# Altium PCB PCB1.PcbDoc
Units mm, origin at the board's own origin, x right, y up, seen from the top; angles counter-clockwise.
Board outline 58.25 x 58.25 mm, 2 copper layers (Top Layer, Bottom Layer); 40 components, 36 nets, 187 pads, 36 vias.
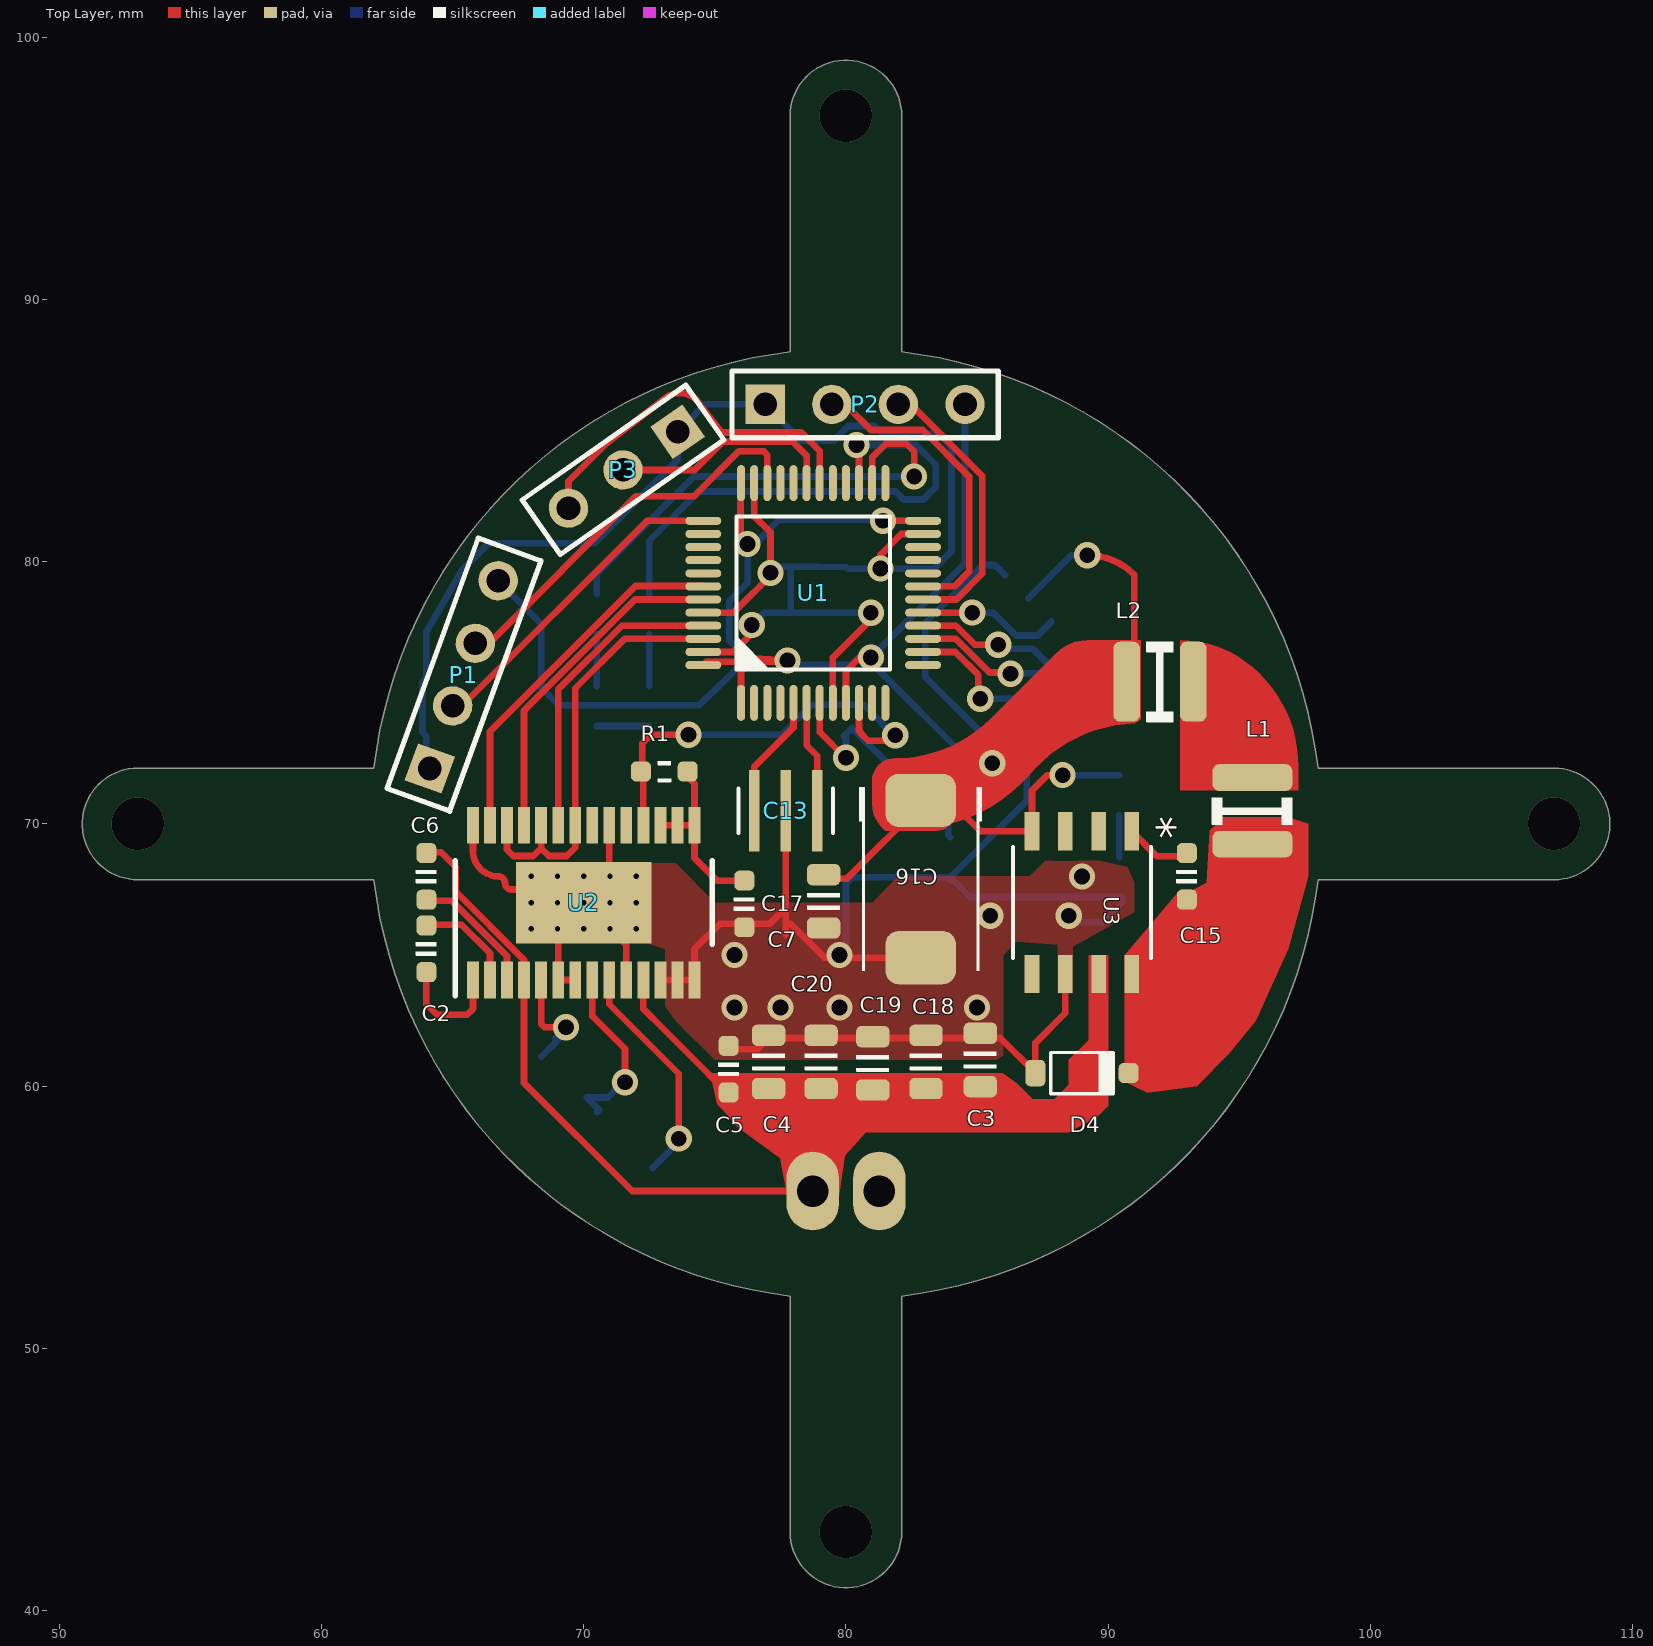
[diagram p0: Top Layer view]
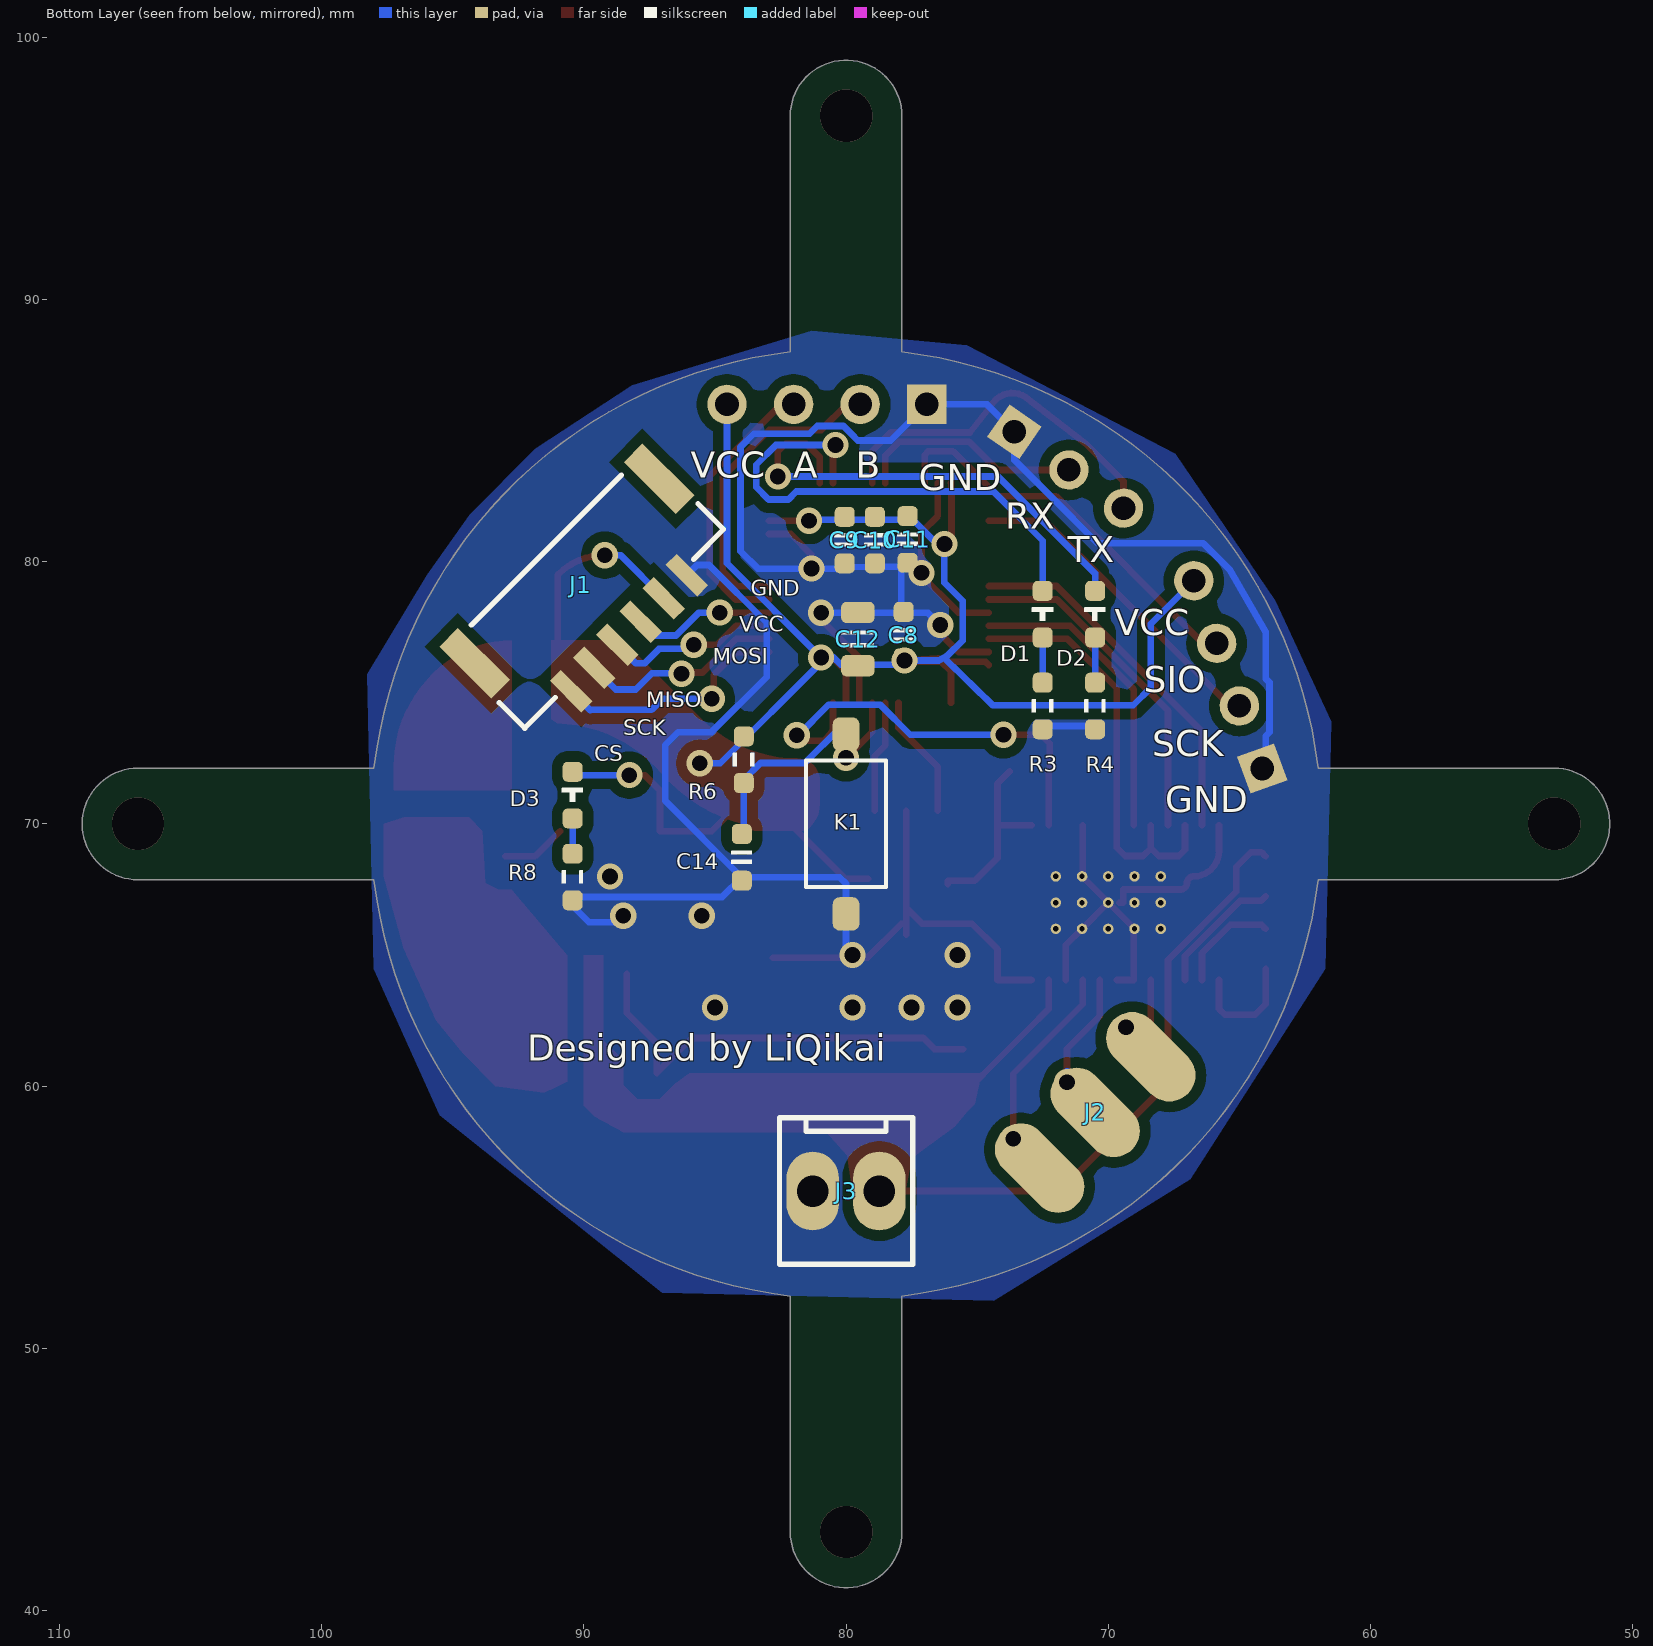
[diagram p1: Bottom Layer view, seen from below]
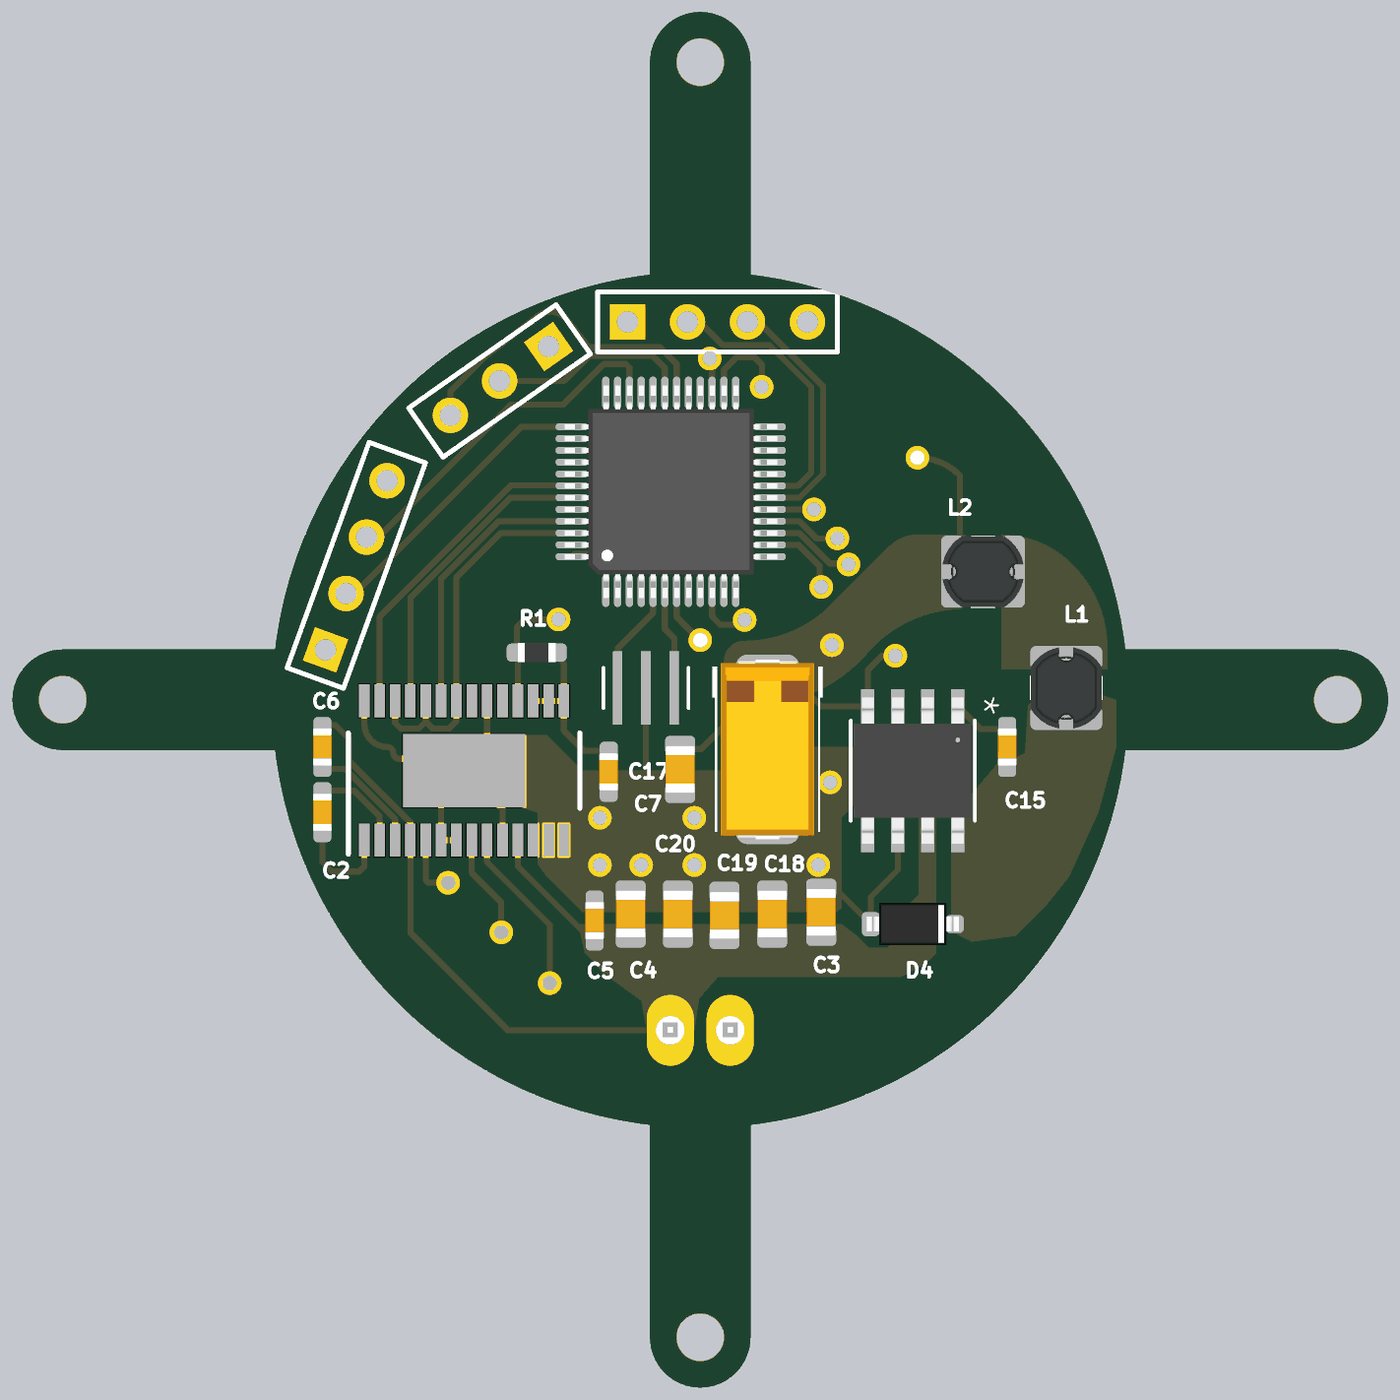
[diagram p2: 3D render of the assembled board from above, using the file's embedded part models]
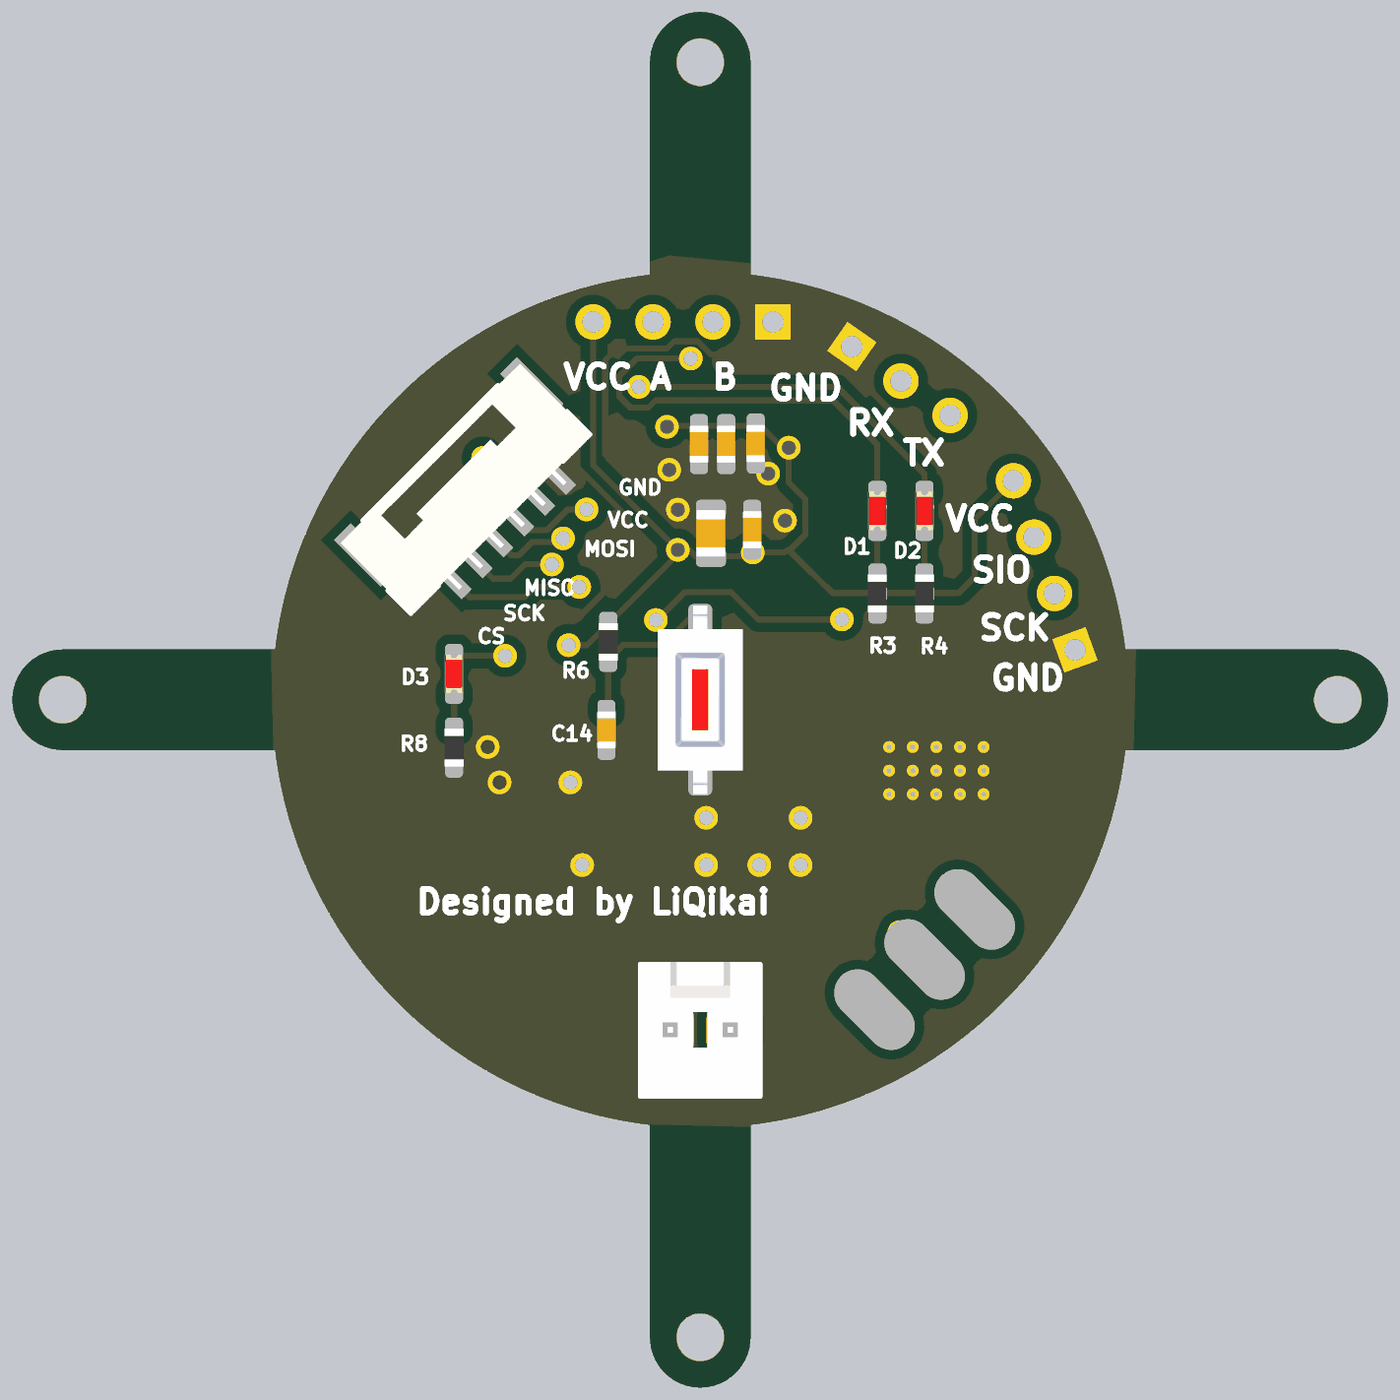
[diagram p3: 3D render of the assembled board from below, using the file's embedded part models]

## Layer stack, top to bottom
Top Solder: solder mask 0.0102, Solder Resist, Dk 3.5
Top Layer: signal copper 0.0356
Dielectric 1: dielectric 0.32, FR-4, Dk 4.8
Bottom Layer: signal copper 0.0356
Bottom Solder: solder mask 0.0102, Solder Resist, Dk 3.5

## Board outline
53,67.873 61.998,67.873 ccw(c80,70) 77.873,51.998 77.873,43 ccw(c80,43) 82.127,43 82.127,51.998 ccw(c80,70) 98.002,67.873 107,67.873 ccw(c107,70) 109.127,70 ccw(c107,70) 107,72.127 98.002,72.127 ccw(c80,70) 82.127,88.002 82.127,97 ccw(c80,97) 77.873,97 77.873,88.002 ccw(c80,70) 61.998,72.127 53,72.127 ccw(c53,70)

## Design rules (kind name [scope] priority, off if disabled: settings)
Clearance Clearance_1 [(InPoly)] p1: gap=0.4 ignorepadtopadclearanceinfootprint=TRUE
Clearance [All] p2: gap=0.1 ignorepadtopadclearanceinfootprint=TRUE
ComponentClearance [InComponent('U1') vs OnLayer('Mechanical 13')] p1: gap=0.15 collisioncheckmode=3 verticalgap=0.15 showdistances=FALSE
MinimumSolderMaskSliver [All] p1: minsoldermaskwidth=0
PlaneConnect [All] p1: planeconnectstyle=Direct reliefexpansion=0.508 reliefentries=4 reliefconductorwidth=0.254 reliefairgap=0.254
PolygonConnect [All] p1: connectstyle=Direct reliefconductorwidth=0.254 reliefentries=4 polygonreliefangle="90 Angle" airgapwidth=0.254
RoutingVias RoutingVias_1 [All] p1: holewidth=0.711 width=1.27 viastyle="Through Hole" minholewidth=0.711 minwidth=1.27 maxholewidth=0.711 maxwidth=1.27 useviatemplates=TRUE viatemplateguid#1={CD471C17-E340-4C54-9564-A7C13DCCF5B5} viatemplatename#1=v100h60
SolderMaskExpansion [All] p1: expansion=0
Width [All] p1: maxlimit=0.254 minlimit=0.254 preferedwidth=0.254
27 further rules are at their usual default settings.

## Components (designator, comment, footprint, x,y, rotation, side; value= is the part's Value field where it differs from the comment)
C2 "C0603" CAP_0603 64,65.238 r90 top value=0.01uF
C3 "C0805" CAP_0805 85.125,61 r270 top value=10uF
C4 "C0805" CAP_0805 77.053,60.925 r270 top value=10uF
C5 "C0603" CAP_0603 75.525,60.65 r270 top value=0.1uF
C6 "C0603" CAP_0603 64,68 r90 top value=0.1uF
C7 "C0603" CAP_0603 76.125,66.95 r90 top value=0.47uF
C8 "C0603" CAP_0603 77.8,77.2 r270 bottom value=0.1uF
C9 "C0603" CAP_0603 80.05,80.825 r90 bottom value=0.1uF
C10 "C0603" CAP_0603 78.9,80.825 r90 bottom value=0.1uF
C11 "C0603" CAP_0603 77.65,80.85 r90 bottom value=0.1uF
C12 "C0805" CAP_0805 79.55,77.05 r270 bottom value=4.7uF
C13 "CSTCE8M00G52-R0" CSTCE_MUR 77.7,70.5 r0 top
C14 "C0603" CAP_0603 83.975,68.725 r90 bottom value=4.7uF
C15 "C0603" CAP_0603 93,68 r270 top value=?F
C16 "C2917" CAP_TAN_D2917 82.85,67.9 r270 top value=100uF
C17 "C0805" CAP_0805 79.15,67.05 r90 top value=10uF
C18 "C0805" CAP_0805 83.053,60.925 r270 top value=10uF
C19 "C0805" CAP_0805 81.025,60.871 r270 top value=10uF
C20 "C0805" CAP_0805 79.053,60.925 r270 top value=10uF
D1 "D0603" LED_0603_RED 72.5,78 r270 bottom value=Red
D2 "D0603" LED_0603_RED 70.5,78 r270 bottom value=Orange
D3 "D0603" LED_0603_RED 90.425,71.1 r270 bottom value=Green
D4 "NAME" SOD-123 89,60.5 r0 top
J1 "MAG" "JST BM06B-GHS-TBT" 90,79 r135 bottom
J2 "Header" Motor_WIRE_3 70.5,59 r135 bottom
J3 "2 Pin" "MOLEX KK 0022272021" 80,56 r0 bottom
K1 "TACT" ButtonTACT_3x6x2.5_180 80,70 r90 bottom value=3x6mm
L1 "CD32" IND_CD32 95.5,70.5 r90 top value=22uH
L2 "CD32" IND_CD32 91.975,75.425 r180 top value=22uH
P1 "SWD" HDR1X4 64.131,72.113 r70 top
P2 "ENCODER" HDR1X4 76.92,86 r0 top
P3 "Header 3" HDR1X3 73.581,84.957 r215 top
R1 "R0603" RES_0603 73.075,72 r0 top value=10K
R3 "R0603" RES_0603 72.5,74.5 r90 bottom value=1K
R4 "R0603" RES_0603 70.5,74.5 r90 bottom value=1K
R6 "R0603" RES_0603 83.9,72.45 r90 bottom value=10K
R8 "R0603" RES_0603 90.425,67.975 r90 bottom value=1K
U1 "STM32F103C" LQFP_P0.5_48 78.75,78.809 r90 top
U2 "DRV8313PWPR" PWP0028F_N 70,67 r90 top value=Value
U3 "LM2674M-3.3" M08A_TEX 89,67 r270 top

## Footprints (in the part's own frame and the unit in brackets; to place one, negate y for a bottom-side part, rotate by r counter-clockwise, add the part's x,y. Pads: shape width x height; smd on the part's side, far side on the other; paste and mask are expansions set on the pad)
ButtonTACT_3x6x2.5_180 [mil]
  rrect50% 50x40 smd: 1(-135,0) 2(135,0)
  silkscreen extent -95,-60 95,60, body extent -157,-71 157,71, height 94
CAP_0603 [mil]
  rrect50% 30x30 smd: 1(-35,0) 2(35,0)
  silkscreen extent -10,-15 10,15, body extent -31,-16 31,16, height 31
CAP_0805 [mil]
  rrect50% 32x50 smd: 1(-40,0) 2(40,0)
  silkscreen extent -12,-24 12,24, body extent -39,-25 39,25, height 39
CAP_TAN_D2917 [mil]
  rrect50% 80x106 smd: 1(-118,0) 2(118,0)
  silkscreen extent -138,-92 138,92, body extent -150,-78 150,78, height 122
CSTCE_MUR [mil]
  rect 16x122.36 smd paste+0 mask+0: 1(-47.24,0) 2(0,0) 3(47.24,0)
  silkscreen extent -71,-34 71,34, body extent 0,0 10,10, height 10
HDR1X3 [mm] "Connector; Header; 3 Position"
  rect 1.5x1.5 hole 0.9: 1(0,0)
  round 1.5 hole 0.9: 2(2.54,0) 3(5.08,0)
  silkscreen extent -1.27,-1.27 6.35,1.27
HDR1X4 [mm] "Connector; Header; 4 Position"
  rect 1.5x1.5 hole 0.9: 1(0,0)
  round 1.5 hole 0.9: 2(2.54,0) 3(5.08,0) 4(7.62,0)
  silkscreen extent -1.27,-1.27 8.89,1.27
IND_CD32 [mil]
  rrect50% 40x120 smd: 1(-50,0) 2(50,0)
  silkscreen extent -20,-60 20,60, body extent -68,-59 68,59, height 83
"JST BM06B-GHS-TBT" [mm] "JST GH Series 1.25mm pitch, top entry connector"
  rect 0.6x1.7 smd: 1(-3.125,-2.437) 2(-1.875,-2.437) 3(-0.625,-2.437) 4(0.625,-2.437) 5(1.875,-2.437) 6(3.125,-2.437)
  rect 1x2.8 smd: M(-4.975,0.913) M(4.975,0.913)
  silkscreen extent -5.38,-2.19 5.35,2.03, body extent -5.38,-2.92 5.37,2.03, height 4.18
LED_0603_RED [mil]
  rrect50% 30x30 smd: 1(-35,0) 2(35,0)
  silkscreen extent -10,-16 10,16, body extent -32,-16 32,16, height 24
LQFP_P0.5_48 [mil]
  oval 54x12 smd: 1(-165,108.27) 2(-165,88.58) 3(-165,68.9) 4(-165,49.21) 5(-165,29.53) 6(-165,9.84) 7(-165,-9.84) 8(-165,-29.53) 9(-165,-49.21) 10(-165,-68.9) 11(-165,-88.58) 12(-165,-108.27) 25(165,-108.27) 26(165,-88.58) 27(165,-68.9) 28(165,-49.21) 29(165,-29.53) 30(165,-9.84) 31(165,9.84) 32(165,29.53) 33(165,49.21) 34(165,68.9) 35(165,88.58) 36(165,108.27)
  oval 12x54 smd: 13(-108.27,-165) 14(-88.58,-165) 15(-68.9,-165) 16(-49.21,-165) 17(-29.53,-165) 18(-9.84,-165) 19(9.84,-165) 20(29.53,-165) 21(49.21,-165) 22(68.9,-165) 23(88.58,-165) 24(108.27,-165) 37(108.27,165) 38(88.58,165) 39(68.9,165) 40(49.21,165) 41(29.53,165) 42(9.84,165) 43(-9.84,165) 44(-29.53,165) 45(-49.21,165) 46(-68.9,165) 47(-88.58,165) 48(-108.27,165)
  silkscreen extent -115,-115 115,115, body extent -177,-178 177,177, height 61
M08A_TEX [mil]
  rect 57.5x22 smd paste+0 mask+0: 1(-107.25,75) 2(-107.25,25) 3(-107.25,-25) 4(-107.25,-75) 5(107.25,-75) 6(107.25,-25) 7(107.25,25) 8(107.25,75)
  silkscreen extent -84,-104 84,104, body extent -122,-99 122,99, height 69
"MOLEX KK 0022272021" [mm]
  oval 2x3 hole 1.2: 1(-1.27,0) 2(1.27,0)
  silkscreen extent -2.54,-2.79 2.54,2.79, body extent -2.54,-2.9 2.54,2.9, height 11.7
Motor_WIRE_3 [mm]
  oval 2x4 smd: 1(-3,0) 2(0,0) 3(3,0)
PWP0028F_N [mm]
  rect 1.4x0.45 smd paste+0 mask+0.051: 1(-2.95,4.225) 2(-2.95,3.575) 3(-2.95,2.925) 4(-2.95,2.275) 5(-2.95,1.625) 6(-2.95,0.975) 7(-2.95,0.325) 8(-2.95,-0.325) 9(-2.95,-0.975) 10(-2.95,-1.625) 11(-2.95,-2.275) 12(-2.95,-2.925) 13(-2.95,-3.575) 14(-2.95,-4.225) 15(2.95,-4.225) 16(2.95,-3.575) 17(2.95,-2.925) 18(2.95,-2.275) 19(2.95,-1.625) 20(2.95,-0.975) 21(2.95,-0.325) 22(2.95,0.325) 23(2.95,0.975) 24(2.95,1.625) 25(2.95,2.275) 26(2.95,2.925) 27(2.95,3.575) 28(2.95,4.225)
  round 0.4 hole 0.203 mask+0.051: 20(-1,2) 20(-1,-1) 20(-1,0) 20(-1,1) 20(-1,-2) 20(0,2) 20(0,1) 20(0,0) 20(0,-1) 20(0,-2) 20(1,2) 20(1,-1) 20(1,0) 20(1,1) 20(1,-2)
  rect 3.1x5.18 smd paste+0 mask+0.051: 29(0,0)
  silkscreen extent -3.55,-4.9 1.6,4.9, body extent 0,0 0.25,0.25, height 0.25
RES_0603 [mil]
  rrect50% 30x30 smd: 1(-35,0) 2(35,0)
  silkscreen extent -10,-16 10,16, body extent -31,-16 31,16, height 18
SOD-123 [mil]
  rrect50% 30x40 smd: 1(-70,0)
  rrect50% 30x30 smd: 2(70,0)
  silkscreen extent -47,-31 47,31, body extent -77,-35 77,35, height 46

## Part data
C2 C5 C6 C7 C8 C9 C10 C11 C14 C15: library part Cap_0603, "Capacitor", Note=±10%, Specification="X7R, ±10%, 16V", Type=0603
C3 C4 C12 C17 C18 C19 C20: library part Cap_0805, "Capacitor", Note=±10%, Specification="X7R, ±10%, 16V", Type=0805
C13 U3: "No Description Available", Built_By=EMA_UL_Team, Copyright="Copyright (C) 2018 Accelerated Designs. All rights reserved", RefDes=RefDes, Type=DEV
  C13: Manufacturer_Part_Number=CSTCE8M00G52-R0, SourceLibrary=Murata_2017-04-18, Vendor=Murata
  U3: Manufacturer_Part_Number=LM2674M-3.3, SourceLibrary=National_2011-09-26, Vendor="Texas Instruments"
C16: library part Cap_Tan_2917, "Capacitor Tantalum", Note=±10%, Specification="X7R, ±10%, 16V", Type=2917
D1 D2 D3: library part LED_0603, "LED", Type=0603
D4: library part Diode_SOD123, "Diode", Type=SOD123
J1: library part "6 Pin"
J2: library part "3 Pin"
K1: library part ButtonTACT_180_3x6x2.5, "Button", Type="TACT 2P"
L1 L2: library part Ind_CD32, "Power Inductor", Note=±5%, Specification="High frequency chip inductor ±5%", Type=CD32
P1 P2: library part "Header 4", "Header, 4-Pin", LatestRevisionDate=17-Jul-2002, LatestRevisionNote="Re-released for DXP Platform.", Publisher="Altium Limited"
P3: "Header, 3-Pin", LatestRevisionDate=17-Jul-2002, LatestRevisionNote="Re-released for DXP Platform.", Publisher="Altium Limited"
R1 R3 R4 R6 R8: library part Res_0603, "Resistor", Note=±1%, Specification=±1%, Type=0603
U1: "MCU ST", Manufacturer=STMicroelectronics, Note=CortexM3, Type="LQFP48 P0.5"
U2: "No Description Available", Manufacturer="Texas Instruments", Copyright="Copyright (C) 2018 Accelerated Designs. All rights reserved", PartNumber=DRV8313PWPR, RefDes=RefDes, Type=DEV

## Via types
v1: diameter 1/1 (per signal layer), hole 0.6, Top Layer to Bottom Layer, 32 vias
v2: diameter 2, hole 2, Top Layer to Bottom Layer, 4 vias

## Nets (pads, with @x,y where several pads share a name; then routed paths per layer and width w, separated by ;. In a path a pad name is that pad's centre, name@x,y a point inside that pad or via, vN(x,y) a via of type N, cw(c..) or ccw(c..) an arc to the next point about the centre after c; other vN are vias at no path point)
A: P2.3 U1.18 | length 10.7
  Top Layer w0.254: P2.3 82.475,86 85.2,83.275 85.2,79.55 84.209,78.559 U1.18
B: P2.2 U1.19 | length 12
  Top Layer w0.254: P2.2 79.975,86 80.952,85.023 82.927,85.023 84.696,83.254 84.696,79.621 84.134,79.059 U1.19
CON: C7.2 R1.2 U2.15 U2.16 U2.17 | length 7.2
  Top Layer w0.254: U2.17 U2.16 U2.15 ; R1.2@73.762,72 74.225,71.537 U2.15 ; C7.2@76.125,67.712 C7.2 75.086,67.839 74.225,68.7 U2.15
EN: U1.46 U2.22 U2.24 U2.26 | length 16.6
  Top Layer w0.254: U2.26 67.075,69.014 67.314,68.775 67.316,68.777 68.077,68.777 68.375,69.075 ; U2.24 68.375,69.075 ; U1.46 71.559,77.059 69.675,75.175 69.675,69.1 69.352,68.777 68.673,68.777 68.375,69.075
ERROR: R1.1 U1.10 U2.18 | length 17.2
  Top Layer w0.254: R1.1@72.238,72 R1.1@72.238,72.19 ; U2.18 72.275,71.963 72.276,71.964 72.281,71.971 72.274,72.007 72.272,72.017 72.269,72.031 R1.1@72.238,72.19 ; v1(74,73.4) 72.561,73.4 72.238,73.077 R1.1@72.238,72.19 ; U1.10 80.5,73.553 80.552,73.501 80.552,73.473 80.85,73.175 82.083,73.175 v1(81.879,73.379)
  Bottom Layer w0.254: v1(74,73.4) 77.55,73.4 78.7,74.55 80.657,74.55 81.829,73.379 v1(81.879,73.379)
GND: C3.1 C4.1 C5.1 C7.1 C8.1 C9.1 C10.1 C11.1 C12.1 C13.2 C14.1 C16.2 C17.1 C18.1 C19.1 C20.1 D4.1 J1.6 J3.2 K1.1 P1.1 P2.1 P3.1 R3.1 R4.1 R8.1 U1.8 U1.23 U1.35 U1.44 U1.47 U2.6 U2.7 U2.10 U2.12 U2.13 U2.14 U2.20 U2.28 U2.29 U3.6 | length 152.4
  Top Layer w0.254: U2.28 65.775,68.975 ccw(c66.75,68.975) 66.75,68 cw(c66.75,67.75) 67,67.75 ccw(c67.25,67.75) 67.25,67.5 69.427,67.5 69.427,67 U2.29@69.573,67 ; U2.7 U2.6 69.025,66.025 U2.29 ; U2.20@70.975,69.95 70.975,67.975 U2.29 ; U2.10 71.625,65.375 71,66 U2.29 ; U2.12 U2.13 U2.14 74.225,65.225 75.188,66.188 77.087,66.188 77.599,66.7 ; U1.47 75.706,76.559 76.733,77.586 v1(76.411,77.586) ; U1.44 75.709,78.059 v1@77.225,79.575 ; C5.1@75.525,61.412 76.625,61.412 77.053,61.839 C3.1@85.05,61.839 ; U1.35 76.5,81.75 77.125,81.125 v1(77.125,79.575) v1@77.225,79.575 ; v1@77.325,79.675 v1@77.225,79.575 ; 77.7,65.775 77.7,66.188 ; C13.2 77.7,66.188 ; U1.8 79.5,76.35 80.95,77.8 v1(80.95,78.05) ; v1(81.313,79.738) 81.313,80.263 82.109,81.059 U1.23 ; C16.2@82.8,64.903 79.183,64.903 77.898,66.188 77.7,66.188 ; C3.1@85.125,61.914 C3.1@85.05,61.839 ; U3.6 88.365,62.79 87.222,61.647 D4.1 85.883,61.839 C3.1@85.05,61.839
  Bottom Layer w0.254: P1.1 64,72.244 64,73.346 63.85,73.496 63.85,75.399 64,75.549 64,77.329 65.383,79.708 66.375,80.7 70.4,80.7 72.223,82.523 ; R4.1@70.5,73.738 R3.1@72.5,73.738 ; 72.223,82.523 73.581,83.881 P3.1 74.624,86 P2.1 78.295,84.625 79.549,84.625 79.673,84.749 79.673,84.751 80.099,85.177 81.098,85.177 81.396,84.879 83.521,84.879 84.025,84.375 84.025,80.4 83.363,79.738 v1(81.313,79.738) 80.05,79.738 80,79.788 78.925,79.813 77.438,79.813 77.2,79.575 v1(77.125,79.575) ; v1(76.411,77.586) 76.875,78.05 v1(80.95,78.05) ; C11.1@77.875,79.763 77.9,79.738 C8.1@77.9,78.089 ; v1@80,64.75 K1.1 80,67.725 80.238,67.963 C14.1@83.975,67.963 ; C14.1 C14.1@83.975,67.963 ; J1.6 85.679,79.875 85.225,79.875 83.025,77.675 83.025,75.6 85.125,73.5 86.4,73.5 86.9,73 86.9,70.888 C14.1@83.975,67.963 ; v1@88.25,66.25 89.8,66.25 90.525,66.975 90.525,67.213 84.725,67.213 C14.1@83.975,67.963
  other v1: 75.75,63 77.5,63 79.75,63 85,63 75.75,65 79.75,65 85.5,66.5 88.5,66.5 89,68
LED1: D2.1 U1.26 | length 18.3
  Top Layer w0.254: U1.26 81,83.975 81.525,84.5 82.3,84.5 82.609,84.191 82.609,83.25 v1(82.6,83.25)
  Bottom Layer w0.254: D2.1@70.5,78.762 D2.1 70.5,79.55 74.2,83.25 v1(82.6,83.25)
LED2: D1.1 U1.27 | length 19.7
  Top Layer w0.254: v1(80.4,84.45) 80.5,84.35 U1.27
  Bottom Layer w0.254: D1.1@72.5,78.762 D1.1 72.5,80.8 74.375,82.675 81.898,82.675 82.198,82.375 82.954,82.375 83.425,82.846 83.425,83.7 82.675,84.45 v1(80.4,84.45)
MISO1: J1.3 U1.16 | length 6.7
  Top Layer w0.254: U1.16 84.191,77.559 84.915,76.835 v1(85.81,76.835)
  Bottom Layer w0.254: v1(85.81,76.835) 85.97,76.675 87.136,76.675 87.686,76.125 88.009,76.125 J1.3
MOSI1: J1.4 U1.17 | length 5.5
  Top Layer w0.254: U1.17 v1(84.816,78.059)
  Bottom Layer w0.254: v1(84.816,78.059) 85.614,78.059 86.484,77.189 87.305,77.189 J1.4
NetC2_1: C2.1 U2.1 | length 4.5
  Top Layer w0.254: C2.1@64,64.476 C2.1 64,63.125 64.4,62.725 65.55,62.725 65.775,62.95 U2.1
NetC2_2: C2.2 U2.2 | length 4
  Top Layer w0.254: C2.2@64,66 64.15,66.15 65.35,66.15 66.425,65.075 U2.2
NetC6_1: C6.1 U2.3 | length 4.9
  Top Layer w0.254: C6.1@64,67.238 64.163,67.075 64.963,67.075 67.075,64.963 U2.3
NetC13_1: C13.1 U1.5 | length 4.7
  Top Layer w0.254: C13.1 76.5,72.175 78,73.675 U1.5
NetC13_3: C13.3 U1.6 | length 4.3
  Top Layer w0.254: U1.6 78.5,73 78.9,72.6 C13.3
NetC14_2: C14.2 K1.2 R6.1 U1.7 | length 10.5
  Top Layer w0.254: U1.7 79,73.5 79.975,72.525 v1(80,72.525)
  Bottom Layer w0.254: v1(80,72.525) 80,73.279 79.925,73.354 K1.2 80.236,73.665 81.575,72.325 83.263,72.325 83.9,71.688 R6.1 83.9,69.562 C14.2@83.975,69.487
NetC15_1: C15.1 U3.1 | length 2.5
  Top Layer w0.254: U3.1 91.867,68.762 C15.1@93,68.762
NetC15_2: C15.2 D4.2 L1.1 U3.8 | length 17.1
  Top Layer w0.254: D4.2 90.778,64.149 U3.8 ; C15.2@93,67.238 C15.2 93,66.371 U3.8 ; L1.1 95.5,65.475 93.575,63.55 91.631,63.55 U3.8
NetD1_2: D1.2 R3.2 | length 2
  Bottom Layer w0.254: R3.2@72.5,75.262 R3.2 D1.2 D1.2@72.5,77.238
NetD2_2: D2.2 R4.2 | length 2
  Bottom Layer w0.254: R4.2@70.5,75.262 R4.2 D2.2 D2.2@70.5,77.238
NetD3_2: D3.2 R8.2 | length 1.6
  Bottom Layer w0.254: R8.2@90.425,68.737 R8.2 D3.2 D3.2@90.425,70.338
NetL1_2: L1.2 L2.1 | length 4.6
  Top Layer w0.254: L2.1 95.5,73.17 L1.2
NSS1: J1.1 U1.14 | length 9.3
  Top Layer w0.254: U1.14 84.166,76.559 85.05,75.675 85.05,74.775 v1(85.125,74.775)
  Bottom Layer w0.254: v1(85.125,74.775) 87,74.775 87.425,74.35 89.75,74.35 89.75,74.331 J1.1
PWM1: U1.42 U2.27 | length 14
  Top Layer w0.254: U2.27 66.425,73.525 71.975,79.075 74.543,79.075 U1.42
PWM2: U1.43 U2.25 | length 13
  Top Layer w0.254: U2.25 67.725,74.324 71.96,78.559 U1.43
PWM3: U1.45 U2.23 | length 11.7
  Top Layer w0.254: U2.23 69.025,75.124 71.46,77.559 U1.45
RX: P3.2 U1.31 | length 8.7
  Top Layer w0.254: P3.2 74.225,83.5 75.296,84.571 77.979,84.571 78.5,84.05 U1.31
SCK1: J1.2 U1.15 | length 7.8
  Top Layer w0.254: U1.15 84.19,77.059 85.474,75.775 86.233,75.775 v1(86.279,75.729)
  Bottom Layer w0.254: v1(86.279,75.729) 86.3,75.749 87.401,75.749 88.021,75.129 88.781,75.129 J1.2
SWDCLK: P1.2 U1.37 | length 12.5
  Top Layer w0.254: P1.2 65.35,74.5 72.409,81.559 U1.37
SWDIO: P1.3 U1.34 | length 15.3
  Top Layer w0.254: P1.3 66.386,76.887 71.999,82.5 72.003,82.496 74.204,82.496 75.925,84.217 76.858,84.217 77,84.075 U1.34
TX: P3.3 U1.30 | length 14
  Top Layer w0.254: P3.3 69.419,83.069 70.827,84.477 73.127,86.259 cw(c73.659,85.539) 74.375,86.075 75.275,84.925 78.3,84.925 79,84.225 U1.30
U: J2.3 U2.5 | length 4.5
  Top Layer w0.254: U2.5 68.375,62.375 68.5,62.25 v1(69.325,62.25)
  Bottom Layer w0.254: J2.3 J2.3@68.925,61.668 ; v1(69.325,62.25) 69.325,62.068 J2.3@69.007,61.75 ; J2.3@68.925,61.668 J2.3@69.007,61.75 ; J2.3@68.925,61.668 68.925,61.832 J2.3@69.007,61.75
V: J2.2 U2.8 | length 7.8
  Top Layer w0.254: U2.8 70.325,62.675 71.575,61.425 v1(71.575,60.15)
  Bottom Layer w0.254: J2.2 70.59,59.09 70.113,59.568 70.918,59.568 71.213,59.863 71.213,60.175 71.175,60.175 71.575,60.575 v1(71.575,60.15)
VCC: C8.2 C9.2 C10.2 C11.2 C12.2 C16.1 C17.2 D3.1 J1.5 L2.2 P1.4 P2.4 R6.2 U1.1 U1.9 U1.24 U1.36 U1.48 U3.4 | length 95.8
  Top Layer w0.254: U1.48 74.68,76.18 76.355,76.18 ; U1.1 76,75.825 76.355,76.18 ; U1.36 75.98,82.98 75.98,80.945 v1(76.25,80.675) ; C17.2@79.15,67.914 80.042,67.914 C16.1@83.025,70.897 ; U1.9 80,75.825 80.525,76.35 v1(80.95,76.35) ; v1(81.409,81.559) U1.24 ; C16.1@82.8,70.897 C16.1 C16.1@83.025,70.897 ; v1(85.575,72.312) 84.812,72.312 ; v1(88.263,71.862) 87.687,71.862 87.095,71.27 U3.4 85.126,69.724 83.953,70.897 C16.1@83.397,70.897 ; v1(89.198,80.25) cw(c89.198,77.71) 90.994,79.506 90.994,76.123 cw(c90.007,76.123) L2.2 87.925,75.425 84.812,72.312 ; 76.355,76.18 77.669,76.18 v1(77.775,76.236) 76.486,76.311 76.355,76.18 ; C16.1@83.025,70.897 C16.1@83.147,70.897 ; C16.1@83.147,70.897 C16.1@83.397,70.897 ; C16.1@83.147,70.897 84.562,72.312 84.812,72.312 ; C16.1@83.397,70.897 84.812,72.312
  Bottom Layer w0.254: P1.4 68.375,77.636 68.375,75.2 69.05,74.525 74.398,74.525 76.232,76.307 76.234,76.309 ; v1(81.409,81.559) 81.368,81.6 77.45,81.6 76.525,80.675 v1(76.25,80.675) 76.25,79.2 75.55,78.5 75.55,76.993 76.125,76.418 ; P2.4 84.54,79.94 v1(80.95,76.35) ; v1(85.575,72.312) 84.8,72.312 80.95,76.162 v1(80.95,76.35) ; J1.5 88.598,80.25 v1(89.198,80.25) ; v1(88.263,71.862) D3.1@90.425,71.862 ; 76.125,76.418 76.234,76.309 ; 76.125,76.418 76.461,76.236 v1(77.775,76.236) 78.036,76.075 80.2,76.075 80.475,76.35 v1(80.95,76.35) ; 76.234,76.309 76.236,76.311 76.234,76.309
VIN: C3.2 C4.2 C5.2 C6.2 C18.2 C19.2 C20.2 J3.1 U2.4 U2.11 U3.7 | length 50.8
  Top Layer w0.254: C6.2@64,68.762 64.163,68.925 64.55,68.925 65.125,68.35 65.125,67.414 67.725,64.814 67.725,60.125 71.85,56 78.4,56 78.4,58.663 77.053,60.011 79.053,60.011 79.107,59.956 81.025,59.956 C19.2@81.125,59.856 ; U2.11 72.275,62.945 73.068,62.152 74.174,61.046 75.332,59.888 C5.2@75.525,59.888 ; C19.2@81.27,59.711 C19.2@81.125,59.856 ; U3.7 89.635,61.035 87.625,59.025 86.475,59.025 85.414,60.086 85.125,60.086 85.05,60.011 81.279,60.011 C19.2@81.125,59.856
W: J2.1 U2.9 | length 9
  Top Layer w0.254: U2.9 70.975,63.125 73.625,60.475 v1(73.625,58)
  Bottom Layer w0.254: J2.1 73.525,57.782 73.325,57.982 73.343,58 v1(73.625,58)
pads on no net: J1.M U1.2 U1.3 U1.4 U1.11 U1.12 U1.13 U1.20 U1.21 U1.22 U1.25 U1.28 U1.29 U1.32 U1.33 U1.38 U1.39 U1.40 U1.41 U2.19 U2.21 U3.2 U3.3 U3.5
copper on no net:
  other v2: 80,43 53,70 107,70 80,97

## Polygon pours and split planes (outlines as drawn)
GND on Top Layer "Top Layer-No Net" (solid, pour order 4): 75,61 85.75,61 86,61.175 86,65 86.5,65.5 88.075,65.4 88.075,63.55 88.65,63.55 88.65,65.319 91,66.625 91,67.75 90.722,68.36 89.613,68.612 88.075,68.575 87.612,68.612 87,68 82,68 81,67 75,67 74.5,67.5 74,68 73.5,68.5 71.5,68.5 71.5,66 72.025,65.575 73.1,65.225 73.1,63.05 73.5,62.5 74.05,61.95 74.5,61.5
GND on Bottom Layer "Top Layer-No Net" (solid, remove dead copper, pour order 6): 75.4,88.25 67.45,84.125 63.639,78.511 61.5,73.9 61.725,64.475 66.875,56.45 74.375,51.825 87.001,52.128 95.5,58.9 98.002,64.475 98.262,75.713 95.975,79.5 94.35,81.8 91.85,84.3 88.149,86.724 81.315,88.815

## Other copper
Top Layer:
  region net NetC15_2: 90.625,65 90.625,60.175 91.5,59.75 93.375,60 94.625,61.25 95.625,62.5 96.875,65.25 97.625,68 97.625,69 97.625,70 96.875,70.25 94.375,70.25 93.875,69.75 93.75,67.75 93.25,67.5 92.75,67.5
  region net VIN: 74.925,60.086 75.1,59.303 75.364,59.039 75.85,58.45 77.5,57.25 77.873,55.255 78.25,54.7 79.025,54.775 79.625,55.125 79.959,57.341 80.75,58.25 81.925,58.25 83,58.25 88.5,58.25 89.575,58.825 90,59.25 90,60.25 90,65 89.25,65 89.25,64.75 89.25,61.75 88.5,61 88.5,59.9 88.1,59.5 87.124,59.5 86.538,60.086 85.988,60.5 83.5,60.5 74.867,60.505
  region net VCC: 84,70 ccw(c82.225,76.199) 87.225,72.127 cw(c91.181,68.404) 91.016,73.834 ccw(c90.647,74.603) 91.25,74 91.25,77 89.207,77 ccw(c89.207,75.293) 88,76.5 85.518,74.018 cw(c81.854,77.682) 81.854,72.5 ccw(c81.853,71.647) 81.25,72.25 ccw(c81.853,71.647) 81,71.646 81,70.75 ccw(c82.207,70.75) 81.354,69.896 81.5,69.75 83.5,69.75 ccw(c83.5,70.354) 83.927,69.927
  region net NetL1_2: 92.75,71.289 97.25,71.289 97.25,72.189 ccw(c92.275,72.189) 95.793,75.707 95.737,75.763 ccw(c92.75,72.776) 92.75,77

## Silkscreen, mask and mechanical layers (free items; w line width, h text height)
Bottom Overlay:
  text "B" at 79.625,83.2 h1
  text "A" at 81.075,83.2 h1
  text "VCC" at 85.925,83.2 h1
  text "GND" at 77.225,82.725 h1
  text "RX" at 73.925,81.25 h1
  text "TX" at 71.55,79.975 h1
  text "GND" at 83.625,78.7 h0.6
  text "VCC" at 84.075,77.325 h0.6
  text "VCC" at 69.75,77.2 h1
  text "MOSI" at 85.075,76.1 h0.6
  text "SIO" at 68.65,75.025 h1
  text "MISO" at 87.625,74.45 h0.6
  text "SCK" at 88.5,73.375 h0.6
  text "SCK" at 68.325,72.575 h1
  text "CS" at 89.6,72.4 h0.6
  text "GND" at 67.825,70.45 h1
  text "Designed by LiQikai" at 92.15,60.975 h1
Mechanical 1:
  lines w0.254: 62,72 53,72 ccw(c53,70) 53,68 62.098,68 ; 62.11,68.012 ccw(c80,70) 78.012,52.11 ; 62.11,71.988 cw(c80,70) 78.012,87.89 ; 78,52 78,43 ccw(c80,43) 82,43 82,52.098 ; 78,87.902 78,97 cw(c80,97) 82,97 82,88 ; 81.988,52.11 ccw(c80,70) 97.89,68.012 ; 81.988,87.89 cw(c80,70) 97.89,71.988 ; 97.902,72 107,72 cw(c107,70) 107,68 98,68

## Text inside footprints (layer, text, board x,y; h text height)
U3: Top Overlay "*" at 91.337,70.296 h1.27 r270; Mechanical 13 "*" at 90.156,68.93 h1.27 r270